# Altium PCB 102709.PcbDoc
Units mil, origin at the board's own origin, x right, y up, seen from the top; angles counter-clockwise.
Board outline 3500 x 3320.03 mil, 2 copper layers (Top Layer, Bottom Layer); 16 components, 23 nets, 58 pads, 4 vias.
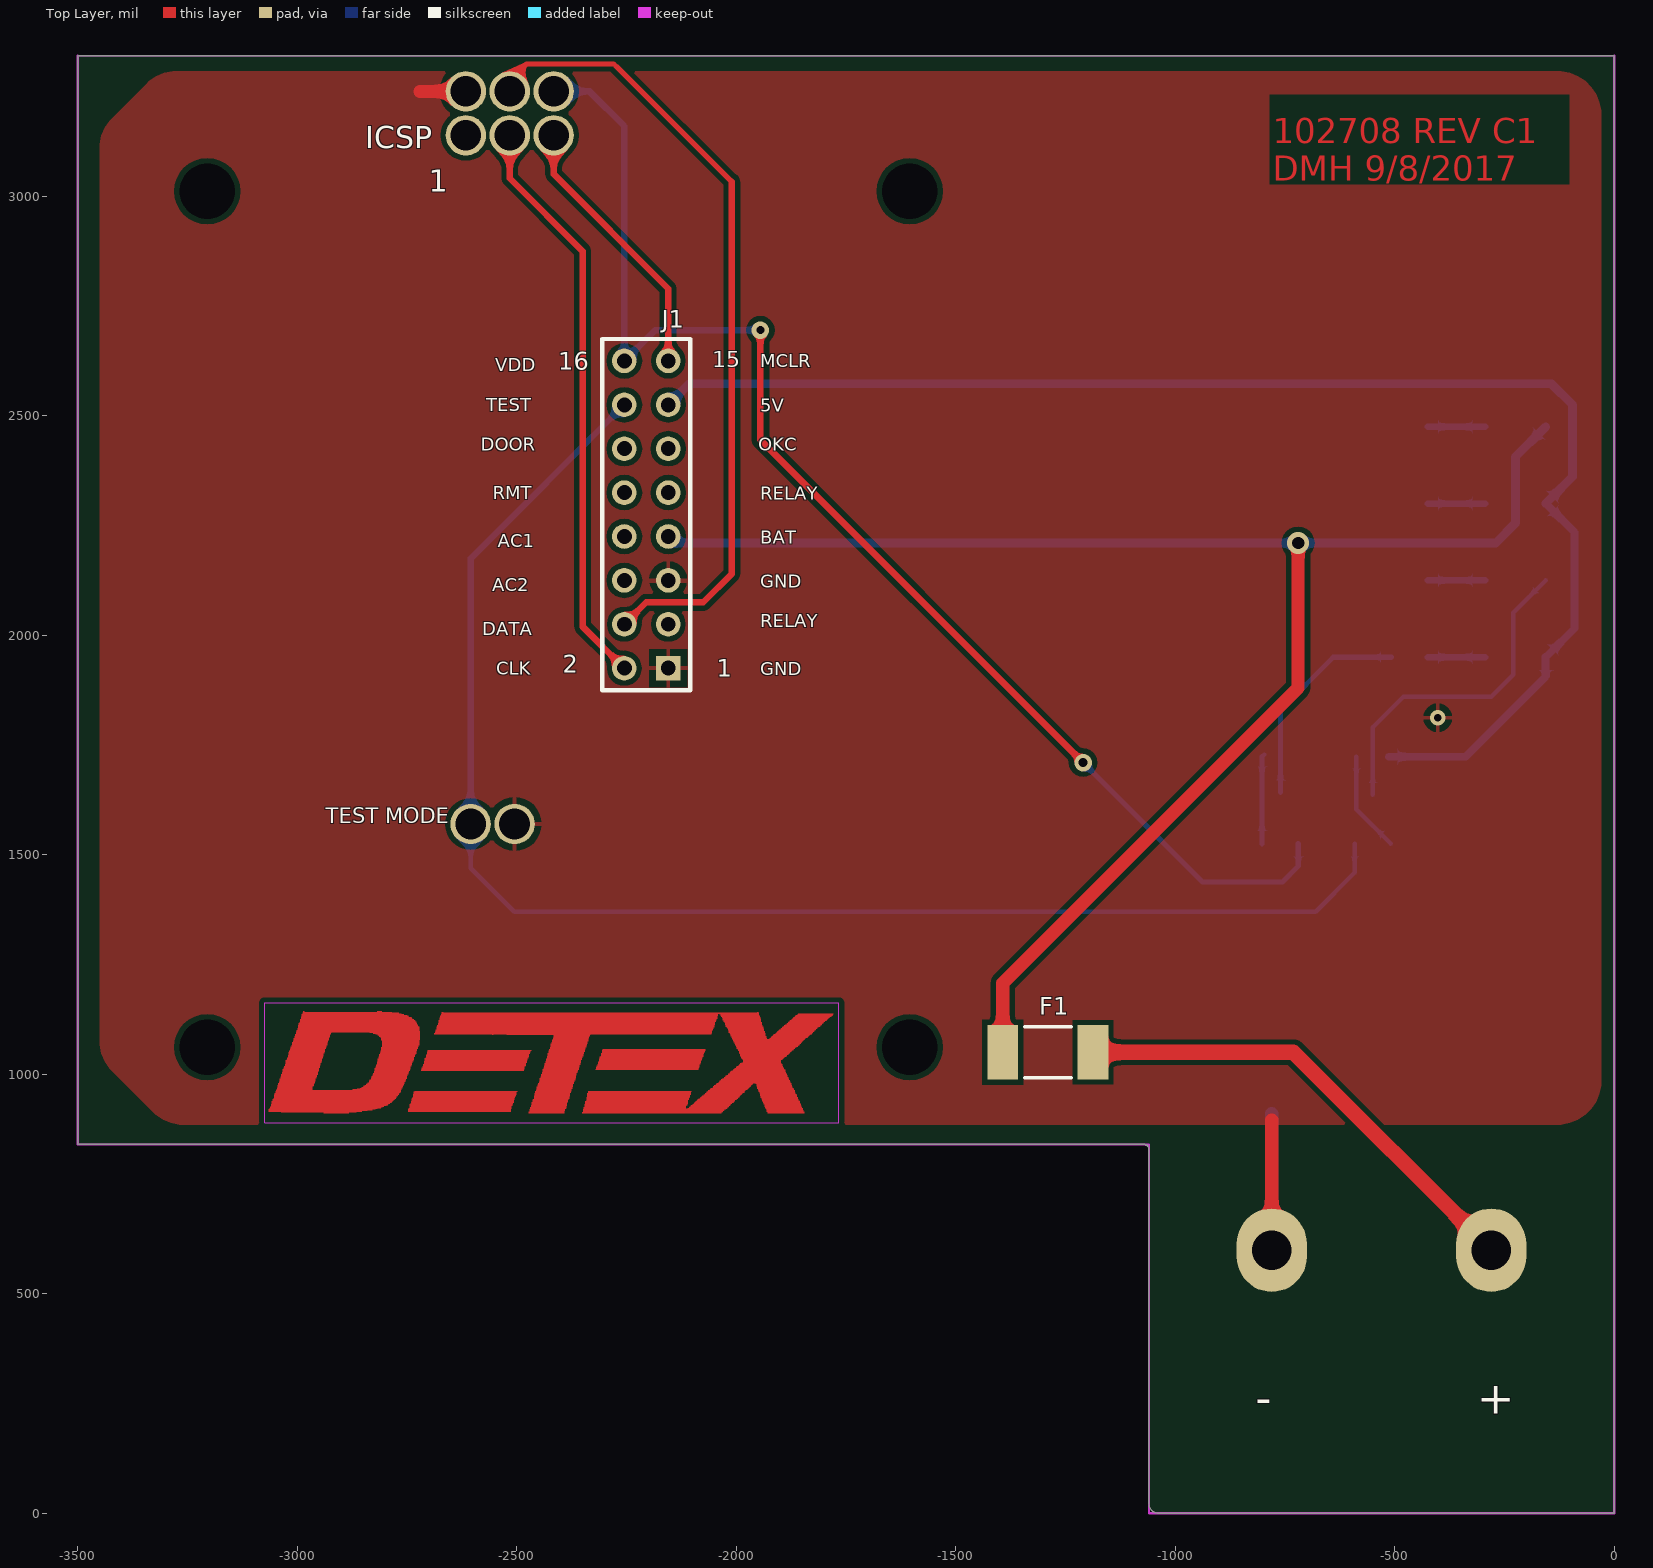
[diagram p0: Top Layer view]
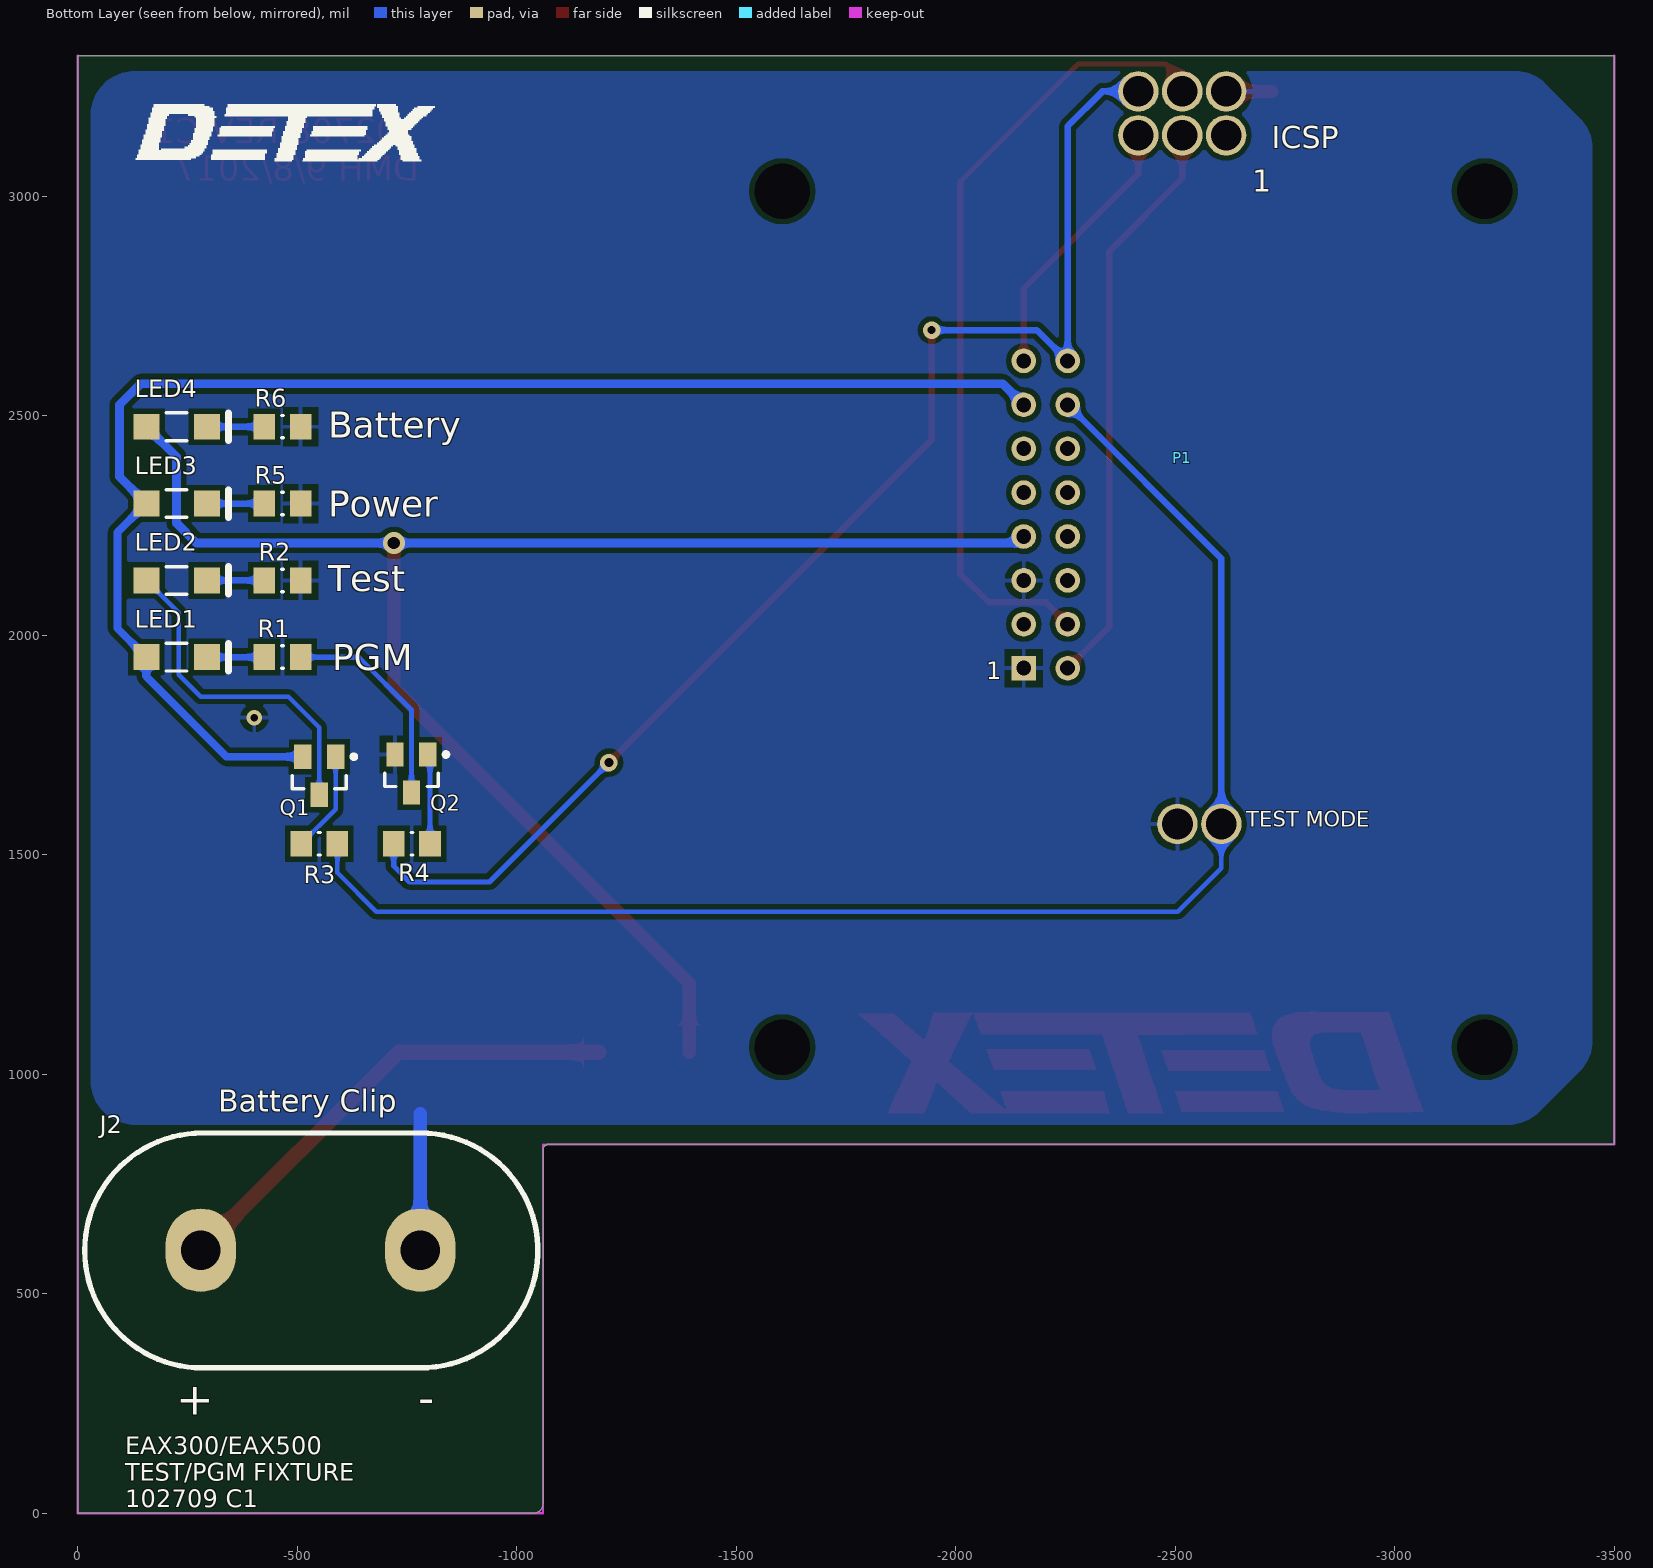
[diagram p1: Bottom Layer view, seen from below]

## Layer stack, top to bottom
Top Solder: solder mask 0.4, Solder Resist, Dk 3.5
Top Layer: signal copper 1.4
Dielectric 1: dielectric 12.6, FR-4, Dk 4.8
Bottom Layer: signal copper 1.4
Bottom Solder: solder mask 0.4, Solder Resist, Dk 3.5

## Board outline
-0.29,1.71 0,3320 -3500,3320 -3500,840 -1071.28,840 cw(c-1070.92,829.09) -1060,829.09 -1060,806 -1060,22 ccw(c-1038,22) -1038,0 -3,0 ccw(c-2.6,2.66) -1,0.5 ccw(c-2.1,1.95)

## Design rules (kind name [scope] priority, off if disabled: settings)
Clearance [All] p1: gap=7 ignorepadtopadclearanceinfootprint=FALSE except(12: Arc-Fill Arc-Poly Arc-Region Track-Fill Track-Poly Track-Region SMDPad-Fill SMDPad-Poly SMDPad-Region THPad-Fill THPad-Poly THPad-Region Via-Fill Via-Poly Via-Region Fill-Fill Fill-Poly Fill-Region Poly-Poly Poly-Region Region-Region)
ComponentClearance [All] p1 off: gap=10 collisioncheckmode=3 verticalgap=10 showdistances=FALSE
HoleSize [All] p1: absolutevalues=TRUE maxlimit=150 minlimit=1 maxpercent=80.000 minpercent=20.000
PlaneClearance [(InNet('GND') AND IsTrack OR IsPolygon)] p1: clearance=0
PlaneClearance PlaneClearance_1 [All] p2: clearance=15
PolygonConnect [All] p1: connectstyle=Relief reliefconductorwidth=10 reliefentries=4 polygonreliefangle="90 Angle" airgapwidth=15
RoutingVias [All] p1: holewidth=18 width=40 viastyle="Through Hole" minholewidth=17 minwidth=30 maxholewidth=28 maxwidth=50
SolderMaskExpansion [All] p1: expansion=4
UnpouredPolygon [All] p1: allowunpoured=TRUE
Width [All] p1: maxlimit=200 minlimit=10 preferedwidth=10
26 further rules are at their usual default settings.

## Components (designator, comment, footprint, x,y, rotation, side; value= is the part's Value field where it differs from the comment)
F1 "1812L050PR" LFUS-1812L050_V -1290,1050 r0 top
J1 "2x8 Header" 2x9_header -2155,2625 r180 top locked
J2 "Battery Connector" "Battery Connector" -280,599 r180 bottom locked
LED1 "HSMG-C150" AVAG-HSMX-C150_V -225,1950 r180 bottom
LED2 "HSMG-C150" AVAG-HSMX-C150_V -225,2125 r180 bottom
LED3 "HSMG-C150" AVAG-HSMX-C150_V -225,2300 r180 bottom
LED4 "HSMG-C150" AVAG-HSMX-C150_V -225,2475 r180 bottom
P1 "POGO PINS" "EAX500 POGOS" -2616,3139 r180 bottom locked
Q1 "MMBT3906" FAIR-SOT23-3_V -550,1680 r270 bottom
Q2 "MMBT3904" FAIR-SOT23-3_V -760,1685 r270 bottom
R1 "Res1" RESC0805(2012)_M -466.34,1950 r180 bottom value=1K
R2 "Res1" RESC0805(2012)_M -466.34,2125 r180 bottom value=1K
R3 "Res1" RESC0805(2012)_M -550,1525 r180 bottom value=1K
R4 "Res1" RESC0805(2012)_M -760.98,1525 r180 bottom value=1K
R5 "Res1" RESC0805(2012)_M -466.34,2300 r180 bottom value=1K
R6 "Res1" RESC0805(2012)_M -466.34,2475 r180 bottom value=2.2K

## Footprints (in the part's own frame and the unit in brackets; to place one, negate y for a bottom-side part, rotate by r counter-clockwise, add the part's x,y. Pads: shape width x height; smd on the part's side, far side on the other; paste and mask are expansions set on the pad)
2x9_header [mil]
  rect 56x56 hole 34: 1(0,700)
  round 56 hole 34: 2(100,700) 3(0,600) 4(100,600) 5(0,500) 6(100,500) 7(0,400) 8(100,400) 9(0,300) 10(100,300) 11(0,200) 12(100,200) 13(0,100) 14(100,100) 15(0,0) 16(100,0)
  silkscreen extent -50,-50 150,750
AVAG-HSMX-C150_V [mm] "SMD, 2-Leads, Body 3.2x1.6mm"
  rect 1.5x1.5 smd: 1(-1.75,0) 2(1.75,0)
  silkscreen extent -0.6,-0.8 3,0.8, body extent -1.6,-0.8 1.6,0.8, height 1.1
"Battery Connector" [mil]
  oval 160x190 hole 90: 1(0,0) 2(500,0)
  silkscreen extent -264,-268 768,267
"EAX500 POGOS" [mil]
  round 92 hole 70: 1(0,0) 2(0,100) 3(-100,0) 4(-100,100) 5(-200,0) 6(-200,100) 7(-11,-1569) 8(-111,-1569)
FAIR-SOT23-3_V [mm] "SOT23, 3-Leads, Body 3.12x1.5mm, Pitch 0.95mm"
  rect 1.4x1 smd: 1(-1.1,0.95) 2(-1.1,-0.95) 3(1.1,0)
  silkscreen extent -1.22,-1.55 0.75,2.12, body extent -1.35,-1.56 1.35,1.56, height 1.2
LFUS-1812L050_V [mm] "Chip Fuse, 2-Leads, Body 4.73x3.41mm"
  rect 1.78x3.15 smd: 1(-2.615,0) 2(2.615,0)
  silkscreen extent -1.35,-1.47 1.35,1.48, body extent -2.36,-1.7 2.36,1.7, height 0.75
RESC0805(2012)_M [mm] "Chip Resistor, Body 2.0x1.3mm, IPC Low Density"
  rect 1.25x1.5 smd: 1(-1.05,0) 2(1.05,0)
  silkscreen extent -0.05,-0.65 0.05,0.65, body extent -1.1,-0.67 1.1,0.67, height 0.7

## Part data
F1: library part CMP-1700-00002-1, "POLY-FUSE(R) Resettable PTC, 0.5 A, 0.15 to 1 Ohm Resistance, -40 to 85 degC, 1812 (4532 Metric), RoHS, Tape and Reel", Case\Package=0603, Case Code (Metric)=1608, Max Operating Temperature="155 degC", Min Operating Temperature="-55 degC", Package Quantity=1, Power Rating="100 mW", Resistance="150 kohm", Tolerance=1%, Voltage Rating="50 V", Case Code (Imperial)=0603, ComponentLink1Description="Manufacturer URL", ComponentLink1URL=http://www.littelfuse.com/, ComponentLink2Description=Datasheet, ComponentLink2URL=http://www.littelfuse.com/~/media/electronics/datasheets/resettable_ptcs/littelfuse_ptc_1812l_datasheet.pdf.pdf, DatasheetVersion=Feb-16, Height="0.45 mm", Length="1.6 mm", Mount="Surface Mount", PackageDescription="2-Pin Surface Mount Device, Body 4.55 x 3.24 mm", PackageReference=1812, Packaging="Tape and Reel", Pins=2, REACH SVHC="No SVHC", RoHSCompliant=true, Voltage Rating (DC)="50 V", Width="0.8 mm"
J1: library part "2x9 Header"
LED1 LED2 LED3 LED4: library part CMP-2000-05061-1, "Chip LED, Green, 65 mW, 25 mA, -40 to 85 degC, 2-Pin SMD, RoHS, Tape and Reel", Forward Current If=20mA, Forward Voltage=2.2V, Forward Voltage VF Max=2.6V, LED Colour=Green, Manufacturer=Avago, Operating Temperature Max=85degC, Operating Temperature Min=-30degC, Operating Temperature Range=-30degCto+85degC, Opto Case Style=SMD, Package Description="2-Pin Surface Mount Device, Body 3.2 x 1.6 mm", Package Reference=HSMX-C150, Reverse Protection Voltage=5V, Storage Temperature Min=-40degC, Bulb Size=1.6mmx2mm, Datasheet URL=https://datasheet.ciiva.com/11774/0900766b804a6539-11774272.pdf, Datasheet Version=Mar-12, Dominant Wavelength=572nm, External Depth=1.1mm, External Length / Height=3.2mm, External Width=1.6mm, Forward Current If Max=20mA, LED Mounting=SMD, LED Type=Standard, Lens Shape=Rectangular, Light Output Orientation=TopEmitting, Luminous Intensity=15mcd, Luminous Intensity @ If Min=4.5mcd, Luminous Intensity Typ=15mcd, Manufacturer URL=http://www.avagotech.com/, Material=GaP, Mounting Type=SMD, MSL=MSL2A-4weeks, No. of Pins=2, Opto Mounting Orientation=Top, Packaging=CutTape, Peak Wavelength=570nm, PIV Max=5V, Storage Temperature Max=85degC, SVHC=NoSVHC(16-Jun-2014), Viewing Angle=170deg, Voltage Vf Min=2.2V, Voltage Vf Typ=2.2V, Wavelength Typ=572nm
P1: library part "EAX500 POGO"
Q1: library part CMP-1670-00011-1, "PNP General-Purpose Amplifier, 40 V, 0.2 A, -55 to 150 degC, 3-Pin SOT23, RoHS, Tape and Reel", Capacitance="1 uF", Case\Package=Radial, Max Operating Temperature="105 degC", Min Operating Temperature="-55 degC", Package Quantity=200, Tolerance=20%, Voltage Rating="50 V", ComponentLink1Description="Manufacturer URL", ComponentLink1URL=https://www.fairchildsemi.com/, ComponentLink2Description=Datasheet, ComponentLink2URL=https://www.fairchildsemi.com/datasheets/MM/MMBT3906.pdf, ComponentLink3Description="Package Specification", ComponentLink3URL=http://www.fairchildsemi.com/dwg/MA/MA03D.pdf, DatasheetVersion="Rev. 1.2.2, 04/2014", Diameter="5 mm", Height="11 mm", Lead Pitch="2 mm", Length="12 mm", Mount="Through Hole", PackageDescription="3-Pin Small Outline Transistor, Body 2.92 x 1.325 mm, Pitch 0.95 mm", PackageReference=SOT23-3, Packaging=Bulk, Pins=2, Radiation Hardening=No, REACH SVHC="No SVHC", RoHSCompliant=true, Voltage Rating (DC)="50 V", Width="0 inch"
Q2: library part CMP-1670-00008-1, "NPN General Purpose Amplifier, 40 V, 0.2 A, -55 to 150 degC, 3-Pin SOT23, RoHS, Tape and Reel", Capacitance="1.8E-11 f", Frequency="12.288 MHz", Frequency Tolerance=30ppm, Load Capacitance="18 pF", Max Operating Temperature=70degC, Min Operating Temperature=-20degC, Package Quantity=1000, ComponentLink1Description="Manufacturer URL", ComponentLink1URL=https://www.fairchildsemi.com/, ComponentLink2Description=Datasheet, ComponentLink2URL=https://www.fairchildsemi.com/datasheets/MM/MMBT3904.pdf, ComponentLink3Description="Package Specification", ComponentLink3URL=http://www.fairchildsemi.com/dwg/MA/MA03D.pdf, DatasheetVersion="Rev. 1.1.0, 10/2014", ESR="40 Ohm", Height="0.041 inch", Length="0.197 inch", Mount="Surface Mount", PackageDescription="3-Pin Small Outline Transistor, Body 2.92 x 1.325 mm, Pitch 0.95 mm", PackageReference=SOT23-3, Packaging="Tape and Reel", Pins=4, REACH SVHC="No SVHC", RoHSCompliant=True, Tolerance=30ppm, Width="0.126 inch"
R1 R2 R3 R4 R5 R6: "Resistor", LatestRevisionDate=17-Jul-2002, LatestRevisionNote="Re-released for DXP Platform.", PackageDescription="Axial Device, Thru-Hole; 2 Leads; 0.3 in Pin Spacing", PackageReference=AXIAL-0.3, Published=8-Jun-2000, Publisher="Altium Limited"

## Free pads (board coordinates)
  round 0 hole 126 unplated: 0(-3205,1061.5) 0(-3205,3011.5) 0(-1605,1061.5) 0(-1605,3011.5)

## Via types
v1: diameter 40, hole 20, Top Layer to Bottom Layer, tented both sides, 1 vias
v2: diameter 35, hole 18, Top Layer to Bottom Layer, tented both sides, 1 vias
v3: diameter 50, hole 28, Top Layer to Bottom Layer, tented both sides, 1 vias
v4: diameter 40, hole 18, Top Layer to Bottom Layer, tented both sides, 1 vias

## Nets (pads, with @x,y where several pads share a name; then routed paths per layer and width w, separated by ;. In a path a pad name is that pad's centre, name@x,y a point inside that pad or via, vN(x,y) a via of type N, cw(c..) or ccw(c..) an arc to the next point about the centre after c; other vN are vias at no path point)
5V: J1.13 LED1.1 LED3.1 Q1.2 | length 3231.1
  Bottom Layer w18: Q1.2 -338.69,1723.31 -156.1,1905.9 LED1.1 -90,2016.1 -90,2233.9 LED3.1
  Bottom Layer w20: J1.13 -2107,2573 -143,2573 -95,2525 -95,2361.1 LED3.1
AC1: J1.6
AC2: J1.8
BATT: F1.1 J1.7 LED4.1 | length 3642.1
  Top Layer w30: F1.1 -1392.95,1207.05 -720,1880 v3(-720,2210)
  Bottom Layer w20: J1.7 -2140,2210 v3(-720,2210) -270,2210 -225,2255 -225,2406.1 LED4.1
CLK: J1.2 P1.3 | length 1322.1
  Top Layer w15: P1.3 -2516,3041 -2350,2875 -2350,2020 J1.2
DATA: J1.4 P1.4 | length 1843.1
  Top Layer w11: P1.4 -2516,3264 -2478.5,3301.5 -2279,3301.5 -2273,3295.5
  Top Layer w12: -2273,3295.5 -2010,3032.5
  Top Layer w15: J1.4 -2205,2075 -2075,2075 -2010,2140 -2010,3032.5
DOOR: J1.12
GND: J1.1 J1.5 J2.2 P1.2 P1.8 Q2.2 R2.2 R5.2 R6.2 | length 711
  Top Layer w30: -2720,3239 P1.2 ; J2.2 -780,895
  Bottom Layer w30: J2.2 -780,910
  other v2: -402,1812
MCLR: J1.15 P1.5 | length 622.1
  Top Layer w15: P1.5 -2416,3050.5 -2155,2789.5 J1.15
NetF1_2: F1.2 J2.1 | length 1093.9
  Top Layer w35: F1.2 -731,1050 J2.1
NetLED1_2: LED1.2 R1.1 | length 131.1
  Bottom Layer w15: R1.1 LED1.2
NetLED2_1: LED2.1 Q1.3 | length 768.6
  Bottom Layer w10: Q1.3 -550,1790 -480,1860 -280,1860 -230,1910 -230,2051.1 LED2.1
NetLED2_2: LED2.2 R2.1 | length 131.1
  Bottom Layer w15: R2.1 LED2.2
NetLED3_2: LED3.2 R5.1 | length 131.1
  Bottom Layer w15: R5.1 LED3.2
NetLED4_2: LED4.2 R6.1 | length 131.1
  Bottom Layer w15: R6.1 LED4.2
NetQ1_1: Q1.1 R3.1 | length 230.9
  Bottom Layer w10: Q1.1 -587.4,1603.74 R3.1
NetQ2_1: Q2.1 R4.2 | length 205.3
  Bottom Layer w10: Q2.1@-802.32,1723.39 Q2.1
  Bottom Layer w12: R4.2 Q2.1@-802.32,1723.39
NetQ2_3: Q2.3 R1.2 | length 490.3
  Bottom Layer w12: Q2.3 -760,1830 -640,1950 R1.2
OKC: J1.11
RELAY: J1.3 J1.9
RMT: J1.10
TEST: J1.14 P1.7 R3.2 | length 3358.7
  Bottom Layer w10: P1.7 -2605,1469 -2506,1370 -680,1370 -591.34,1458.66 R3.2
  Bottom Layer w15: P1.7 -2605,2175 J1.14
VDD: J1.16 P1.6 R4.1 | length 3025.9
  Top Layer w15: v4(-1945,2695) -1945,2445 v1(-1210,1710)
  Bottom Layer w12: v1(-1210,1710) -938,1438 -756,1438 -719.65,1474.35 R4.1
  Bottom Layer w15: P1.6 -2334,3239 -2255,3160 J1.16 -2185,2695 v4(-1945,2695)
pads on no net: P1.1

## Polygon pours and split planes (outlines as drawn)
GND on Top Layer "GND_L01_P004" (solid, remove dead copper, pour order 4): -3258.58,885 cw(c-3258.58,985) -3329.29,914.29 -3420.71,1005.71 cw(c-3350,1076.42) -3450,1076.42 -3450,3108.58 cw(c-3350,3108.58) -3420.71,3179.29 -3344.29,3255.71 cw(c-3273.58,3185) -3273.58,3285 -130,3285 cw(c-130,3185) -30,3185 -30,985 cw(c-130,985) -130,885
GND on Bottom Layer "GND_L02_P006" (solid, remove dead copper, pour order 6): -3258.58,885 cw(c-3258.58,985) -3329.29,914.29 -3420.71,1005.71 cw(c-3350,1076.42) -3450,1076.42 -3450,3108.58 cw(c-3350,3108.58) -3420.71,3179.29 -3344.29,3255.71 cw(c-3273.58,3185) -3273.58,3285 -130,3285 cw(c-130,3185) -30,3185 -30,985 cw(c-130,985) -130,885

## Keep-outs
Top Layer:
  lines w1: -3074.65,889.6 -3074.65,1162.6 -1766.15,1162.6 -1766.15,889.6 -3074.65,889.6
Keep-Out Layer:
  lines w1: -3500,3320 0,3320
  lines w5: -3500,3320 -3500,840 -1145,840 -1060,840 -1060,0 0,0 0,3320

## Other copper
Top Layer:
  region: 540 vertices and 1 holes, not listed, extent -3064.55,911.28 -2720.94,1143.14
  region: 2087 vertices and 0 holes, not listed, extent -2687.58,911.28 -1778.53,1141.47
  region: 319 vertices and 0 holes, not listed, extent -2747.63,914.62 -2499.1,961.32
  region: 322 vertices and 0 holes, not listed, extent -2717.61,1008.03 -2467.41,1054.73
  region: 323 vertices and 0 holes, not listed, extent -2320.63,1009.7 -2070.43,1056.4
  text "102708 REV C1 / DMH 9/8/2017" at -777.5,3035 h56.88

## Silkscreen, mask and mechanical layers (free items; w line width, h text height)
Top Overlay:
  text "ICSP" at -2845,3110 h50
  text "1" at -2700,3010 h50
  text "15" at -2055,2610 h37
  text "MCLR" at -1945,2610 h30
  text "16" at -2405,2605 h40
  text "VDD" at -2549.58,2601.71 h30
  text "TEST" at -2570,2510 h30
  text "5V" at -1945,2508.75 h30
  text "DOOR" at -2582.57,2420 h30
  text "OKC" at -1950,2420 h30
  text "RMT" at -2554.29,2310 h30
  text "RELAY" at -1945,2308.75 h30
  text "BAT" at -1945,2208.75 h30
  text "AC1" at -2543.01,2200.47 h30
  text "GND" at -1945,2108.75 h30
  text "AC2" at -2555.86,2100.47 h30
  text "RELAY" at -1945,2018.75 h30
  text "DATA" at -2579.14,2000.47 h30
  text "2" at -2395,1915 h40
  text "CLK" at -2546.43,1910.47 h30
  text "GND" at -1945,1908.75 h30
  text "1" at -2045,1905 h40
  text "TEST MODE" at -2935,1571.5 h35
  text "-" at -780,226 h75
  text "+" at -226,226 h75
Bottom Overlay:
  drawing of 6 lines, arcs and shapes, not listed
  text "ICSP" at -2720,3110 h50
  text "1" at -2675,3010 h50
  text "Battery" at -570,2450 h60
  text "Power" at -570,2270 h60
  text "Test" at -570,2100 h60
  text "PGM" at -580,1920 h60
  text "TEST MODE" at -2661.68,1563.63 h35
  text "EAX300/EAX500 / TEST/PGM FIXTURE / 102709 C1" at -108,14 h40
Mechanical 1:
  circle w15: c-2555,1570 r150.33
  circle w15: c-2520,3185 r206.52
  lines w18: -3710,2290 -2740,3030 ; -3555,2060 -2745,1665 ; -2850,3030 -2740,3030 ; -2830,1640 -2745,1665 ; -2770,1760 -2745,1665 ; -2740,3030 -2750,2910 -2740,3030
  text "POGO PIN / CONNECTIONS" at -3655,2065 h100
Mechanical 15:
  circle w15: c-2520,3185 r206.52
  circle w15: c-2555,1570 r150.33
  lines w18: -3710,2290 -2740,3030 ; -3555,2060 -2745,1665 ; -2850,3030 -2740,3030 ; -2830,1640 -2745,1665 ; -2770,1760 -2745,1665 ; -2740,3030 -2750,2910 -2740,3030
  text "POGO PIN / CONNECTIONS" at -3655,2065 h100
Drill Drawing:
  circle w10: c884.86,4324.71 r34.71
  lines w1: -3500,3320 0,3320
  lines w5: -3500,3320 -3500,840 -1145,840 -1060,840 -1060,0 0,0 0,3320
  lines w10: 850.15,3838.82 867.51,3838.82 884.86,3821.46 902.21,3838.82 919.56,3838.82 902.21,3856.17 919.56,3873.52 902.21,3873.52 884.86,3890.88 867.51,3873.52 850.15,3873.52 867.51,3856.17 850.15,3838.82 ; 850.15,3977.64 919.56,3977.64 919.56,4047.06 850.15,4047.06 850.15,3977.64 ; 850.15,4203.23 919.56,4203.23 884.86,4133.82 850.15,4203.23 ; 850.15,4463.53 867.51,4463.53 867.51,4446.18 902.21,4446.18 902.21,4463.53 919.56,4463.53 919.56,4498.24 902.21,4498.24 902.21,4515.59 867.51,4515.59 867.51,4498.24 850.15,4498.24 850.15,4463.53 ; 850.15,4602.36 884.86,4619.71 919.56,4602.36 902.21,4637.06 919.56,4671.77 884.86,4654.42 850.15,4671.77 867.51,4637.06 850.15,4602.36 ; 850.15,4758.54 850.15,4775.89 867.51,4793.24 850.15,4810.6 850.15,4827.95 867.51,4827.95 884.86,4810.6 902.21,4827.95 919.56,4827.95 919.56,4810.6 902.21,4793.24 919.56,4775.89 919.56,4758.54 902.21,4758.54 884.86,4775.89 867.51,4758.54 850.15,4758.54
  lines w15: 788.03,3774.61 5065.54,3774.61 ; 788.03,4867.86 5065.54,4867.86 ; 1360.28,3618.43 1360.28,5024.04 ; 1921.55,3618.43 1921.55,5024.04 ; 3117.75,3618.43 3117.75,5024.04 ; 3643.15,3618.43 3643.15,5024.04 ; 4405.86,3618.43 4405.86,5024.04 ; 788.03,3618.43 5065.54,3618.43 5065.54,5024.04 788.03,5024.04 788.03,3618.43
  text "Symbol" at 881.73,4914.72 h74.97
  text "Count" at 1407.13,4914.72 h74.97
  text "Hole Size" at 1968.41,4914.72 h74.97
  text "Plated" at 3164.6,4914.72 h74.97
  text "Hole Type" at 3690,4914.72 h74.97
  text "Via/Pad" at 4452.71,4914.72 h74.97
  text "1" at 1407.13,4758.54 h62.47
  text "20.00mil (0.508mm)" at 1968.41,4758.54 h62.47
  text "PTH" at 3164.6,4758.54 h62.47
  text "Round" at 3690,4758.54 h62.47
  text "Via" at 4452.71,4758.54 h62.47
  text "1" at 1407.13,4602.36 h62.47
  text "28.00mil (0.711mm)" at 1968.41,4602.36 h62.47
  text "PTH" at 3164.6,4602.36 h62.47
  text "Round" at 3690,4602.36 h62.47
  text "Via" at 4452.71,4602.36 h62.47
  text "2" at 1407.13,4446.18 h62.47
  text "18.00mil (0.457mm)" at 1968.41,4446.18 h62.47
  text "PTH" at 3164.6,4446.18 h62.47
  text "Round" at 3690,4446.18 h62.47
  text "Via" at 4452.71,4446.18 h62.47
  text "2" at 1407.13,4290 h62.47
  text "90.00mil (2.286mm)" at 1968.41,4290 h62.47
  text "PTH" at 3164.6,4290 h62.47
  text "Round" at 3690,4290 h62.47
  text "Pad" at 4452.71,4290 h62.47
  text "4" at 1407.13,4133.82 h62.47
  text "126.00mil (3.200mm)" at 1968.41,4133.82 h62.47
  text "NPTH" at 3164.6,4133.82 h62.47
  text "Round" at 3690,4133.82 h62.47
  text "Pad" at 4452.71,4133.82 h62.47
  text "8" at 1407.13,3977.64 h62.47
  text "70.00mil (1.778mm)" at 1968.41,3977.64 h62.47
  text "PTH" at 3164.6,3977.64 h62.47
  text "Round" at 3690,3977.64 h62.47
  text "Pad" at 4452.71,3977.64 h62.47
  text "16" at 1407.13,3821.46 h62.47
  text "34.00mil (0.864mm)" at 1968.41,3821.46 h62.47
  text "PTH" at 3164.6,3821.46 h62.47
  text "Round" at 3690,3821.46 h62.47
  text "Pad" at 4452.71,3821.46 h62.47
  text "34 Total" at 1407.13,3665.28 h62.47
  text "Daniel Hahaj - (830) 629-2900 x4370 / Detex Corp / P/N 102709 / GREEN MASK / WHITE SILK, BOTH SIDES / TWO-SIDED COPPER / FR4 0.063\" THICKNESS / LEAD-FREE ROHS" at 890,1585 h125

## Dimensions
0,3320 to -3500,3320 on Drill Drawing
-3500,840 to -3500,3320 on Drill Drawing
0,0 to 0,3320 on Drill Drawing
0,0 to -1060,0 on Drill Drawing

## Text inside footprints (layer, text, board x,y; h text height)
J1: Bottom Overlay "1" at -2070,1900 h40
J2: Bottom Overlay "-" at -776,226 h75; Bottom Overlay "+" at -224,224 h75; Bottom Overlay "Battery Clip" at -320,915 h50